# Altium PCB SS_MB_CONV1.1.PcbDoc (part 1 of 3)
Units mil, origin at the board's own origin, x right, y up, seen from the top; angles counter-clockwise.
Board outline 10350 x 8520 mil, 2 copper layers (Top Layer, Bottom Layer); 190 components, 282 nets, 1015 pads, 457 vias.
Unrouted connection lines stored in the file: 1.
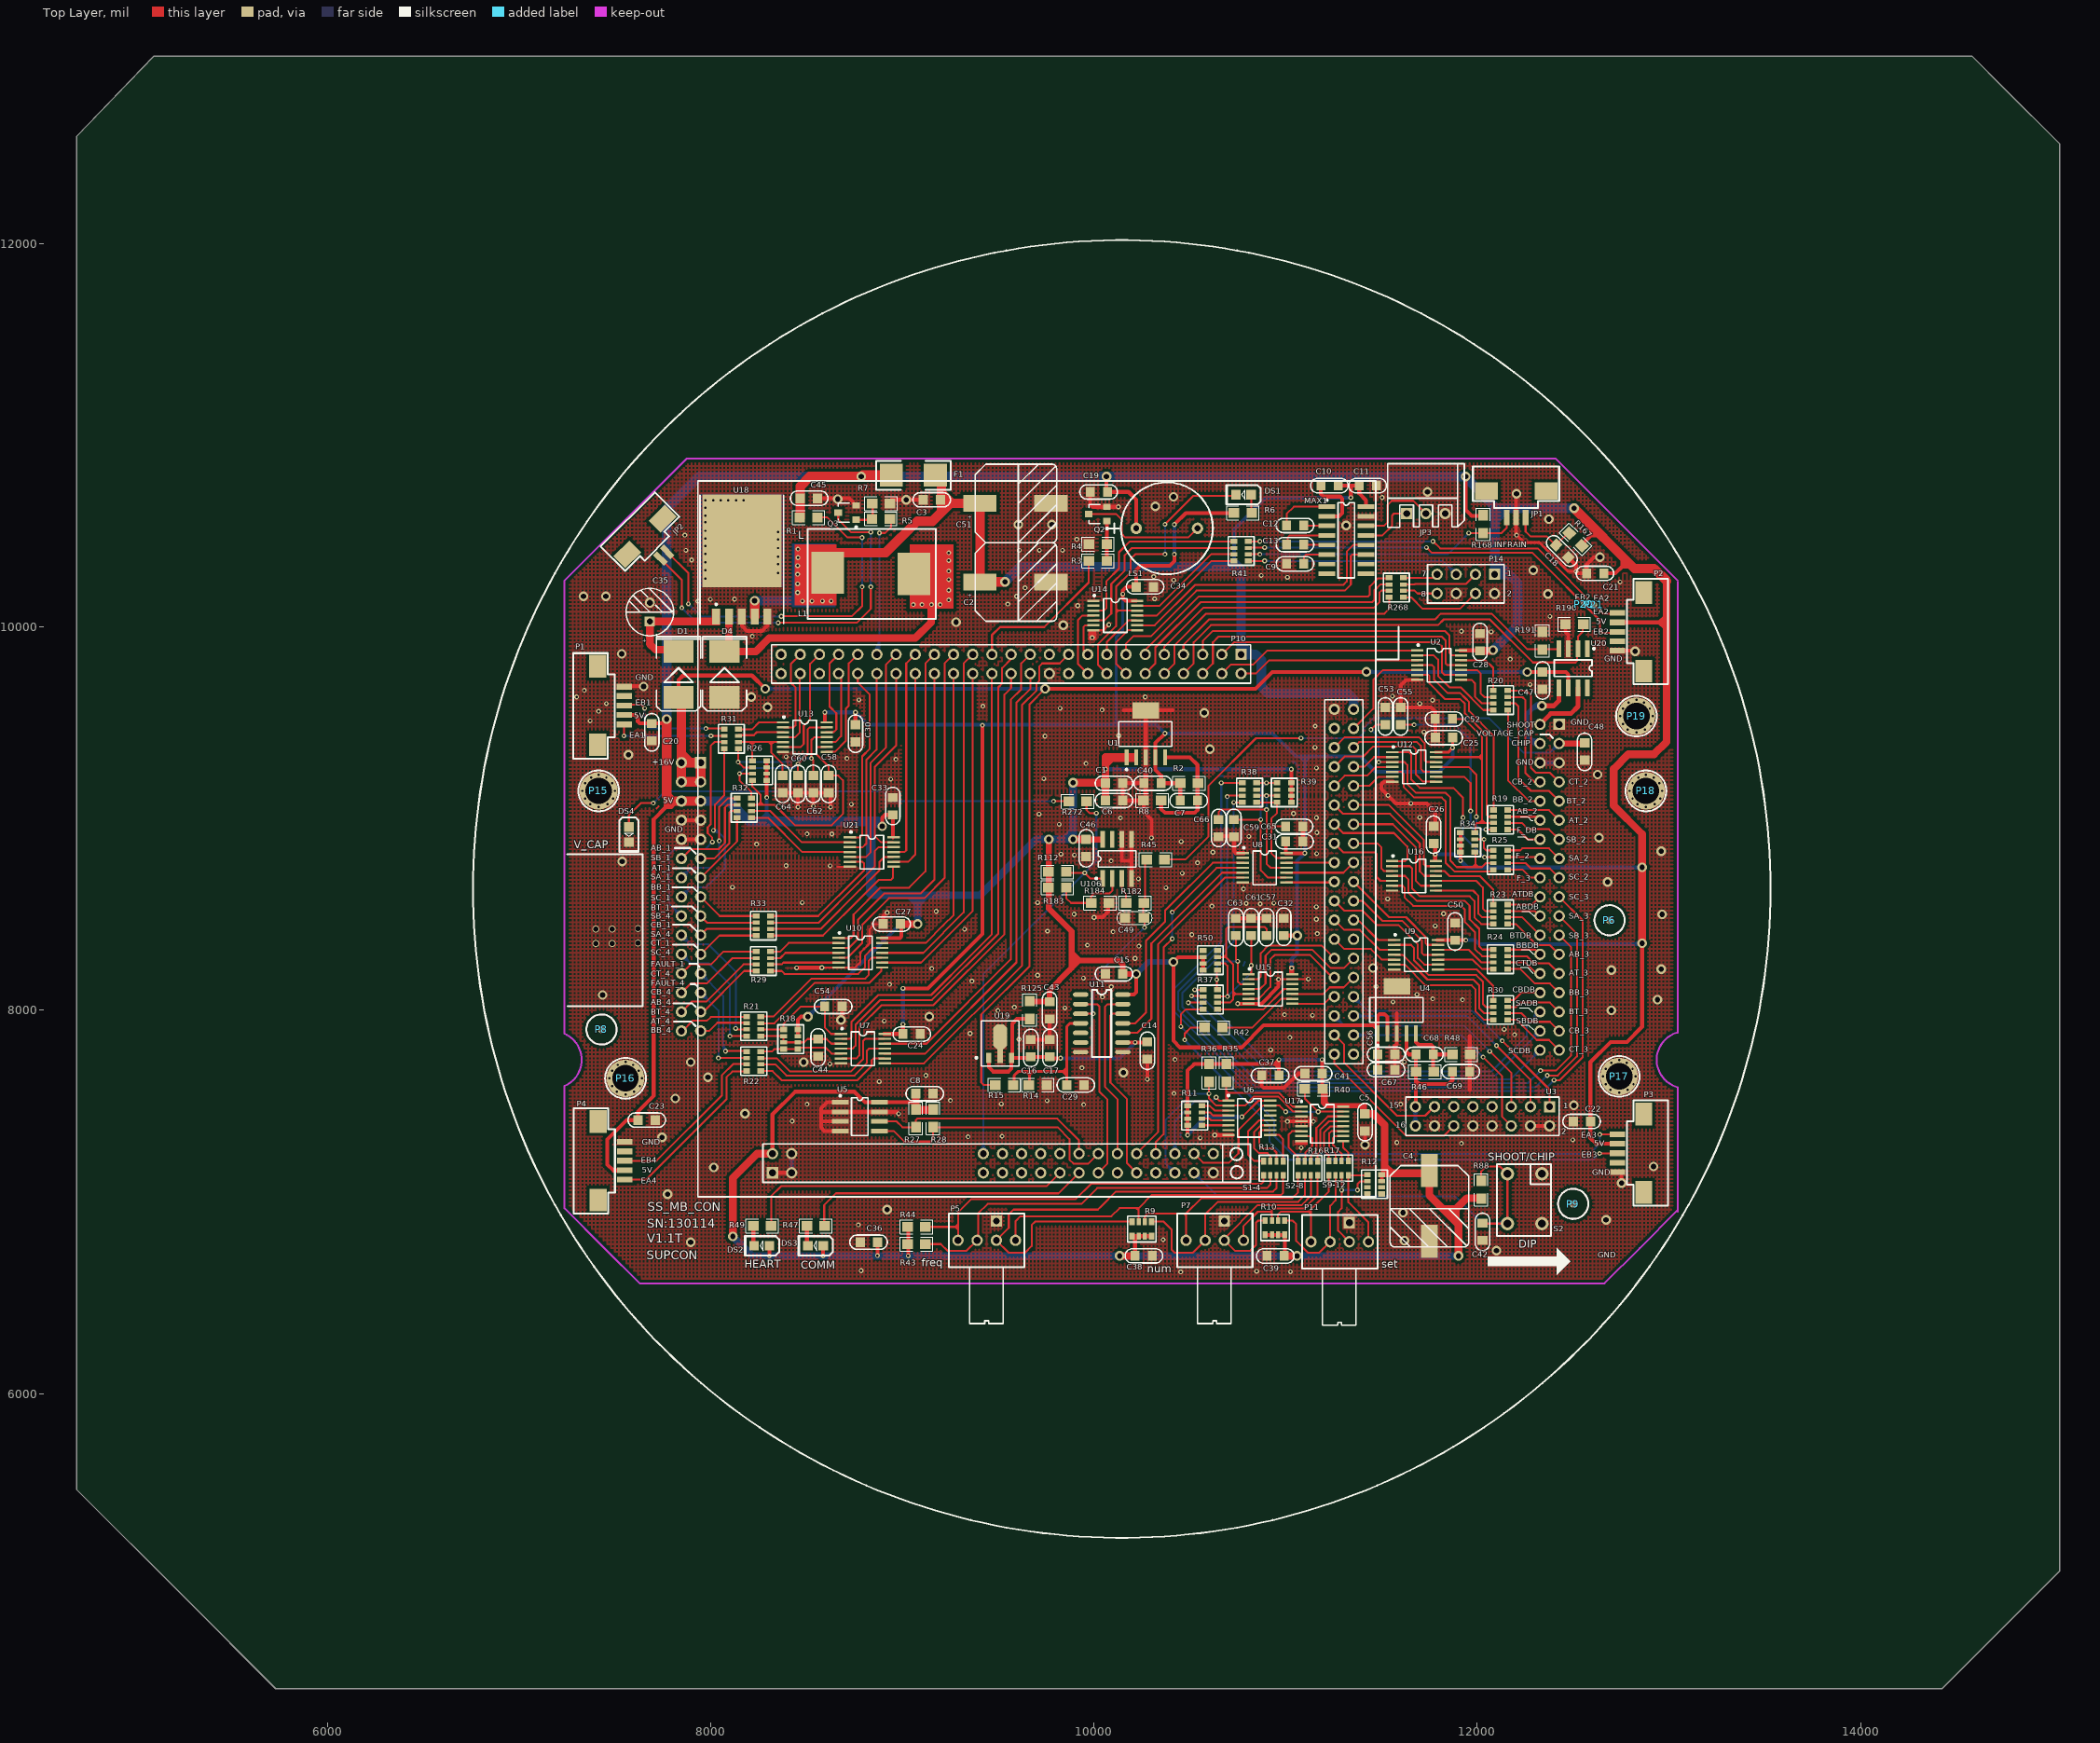
[diagram p0: Top Layer view]
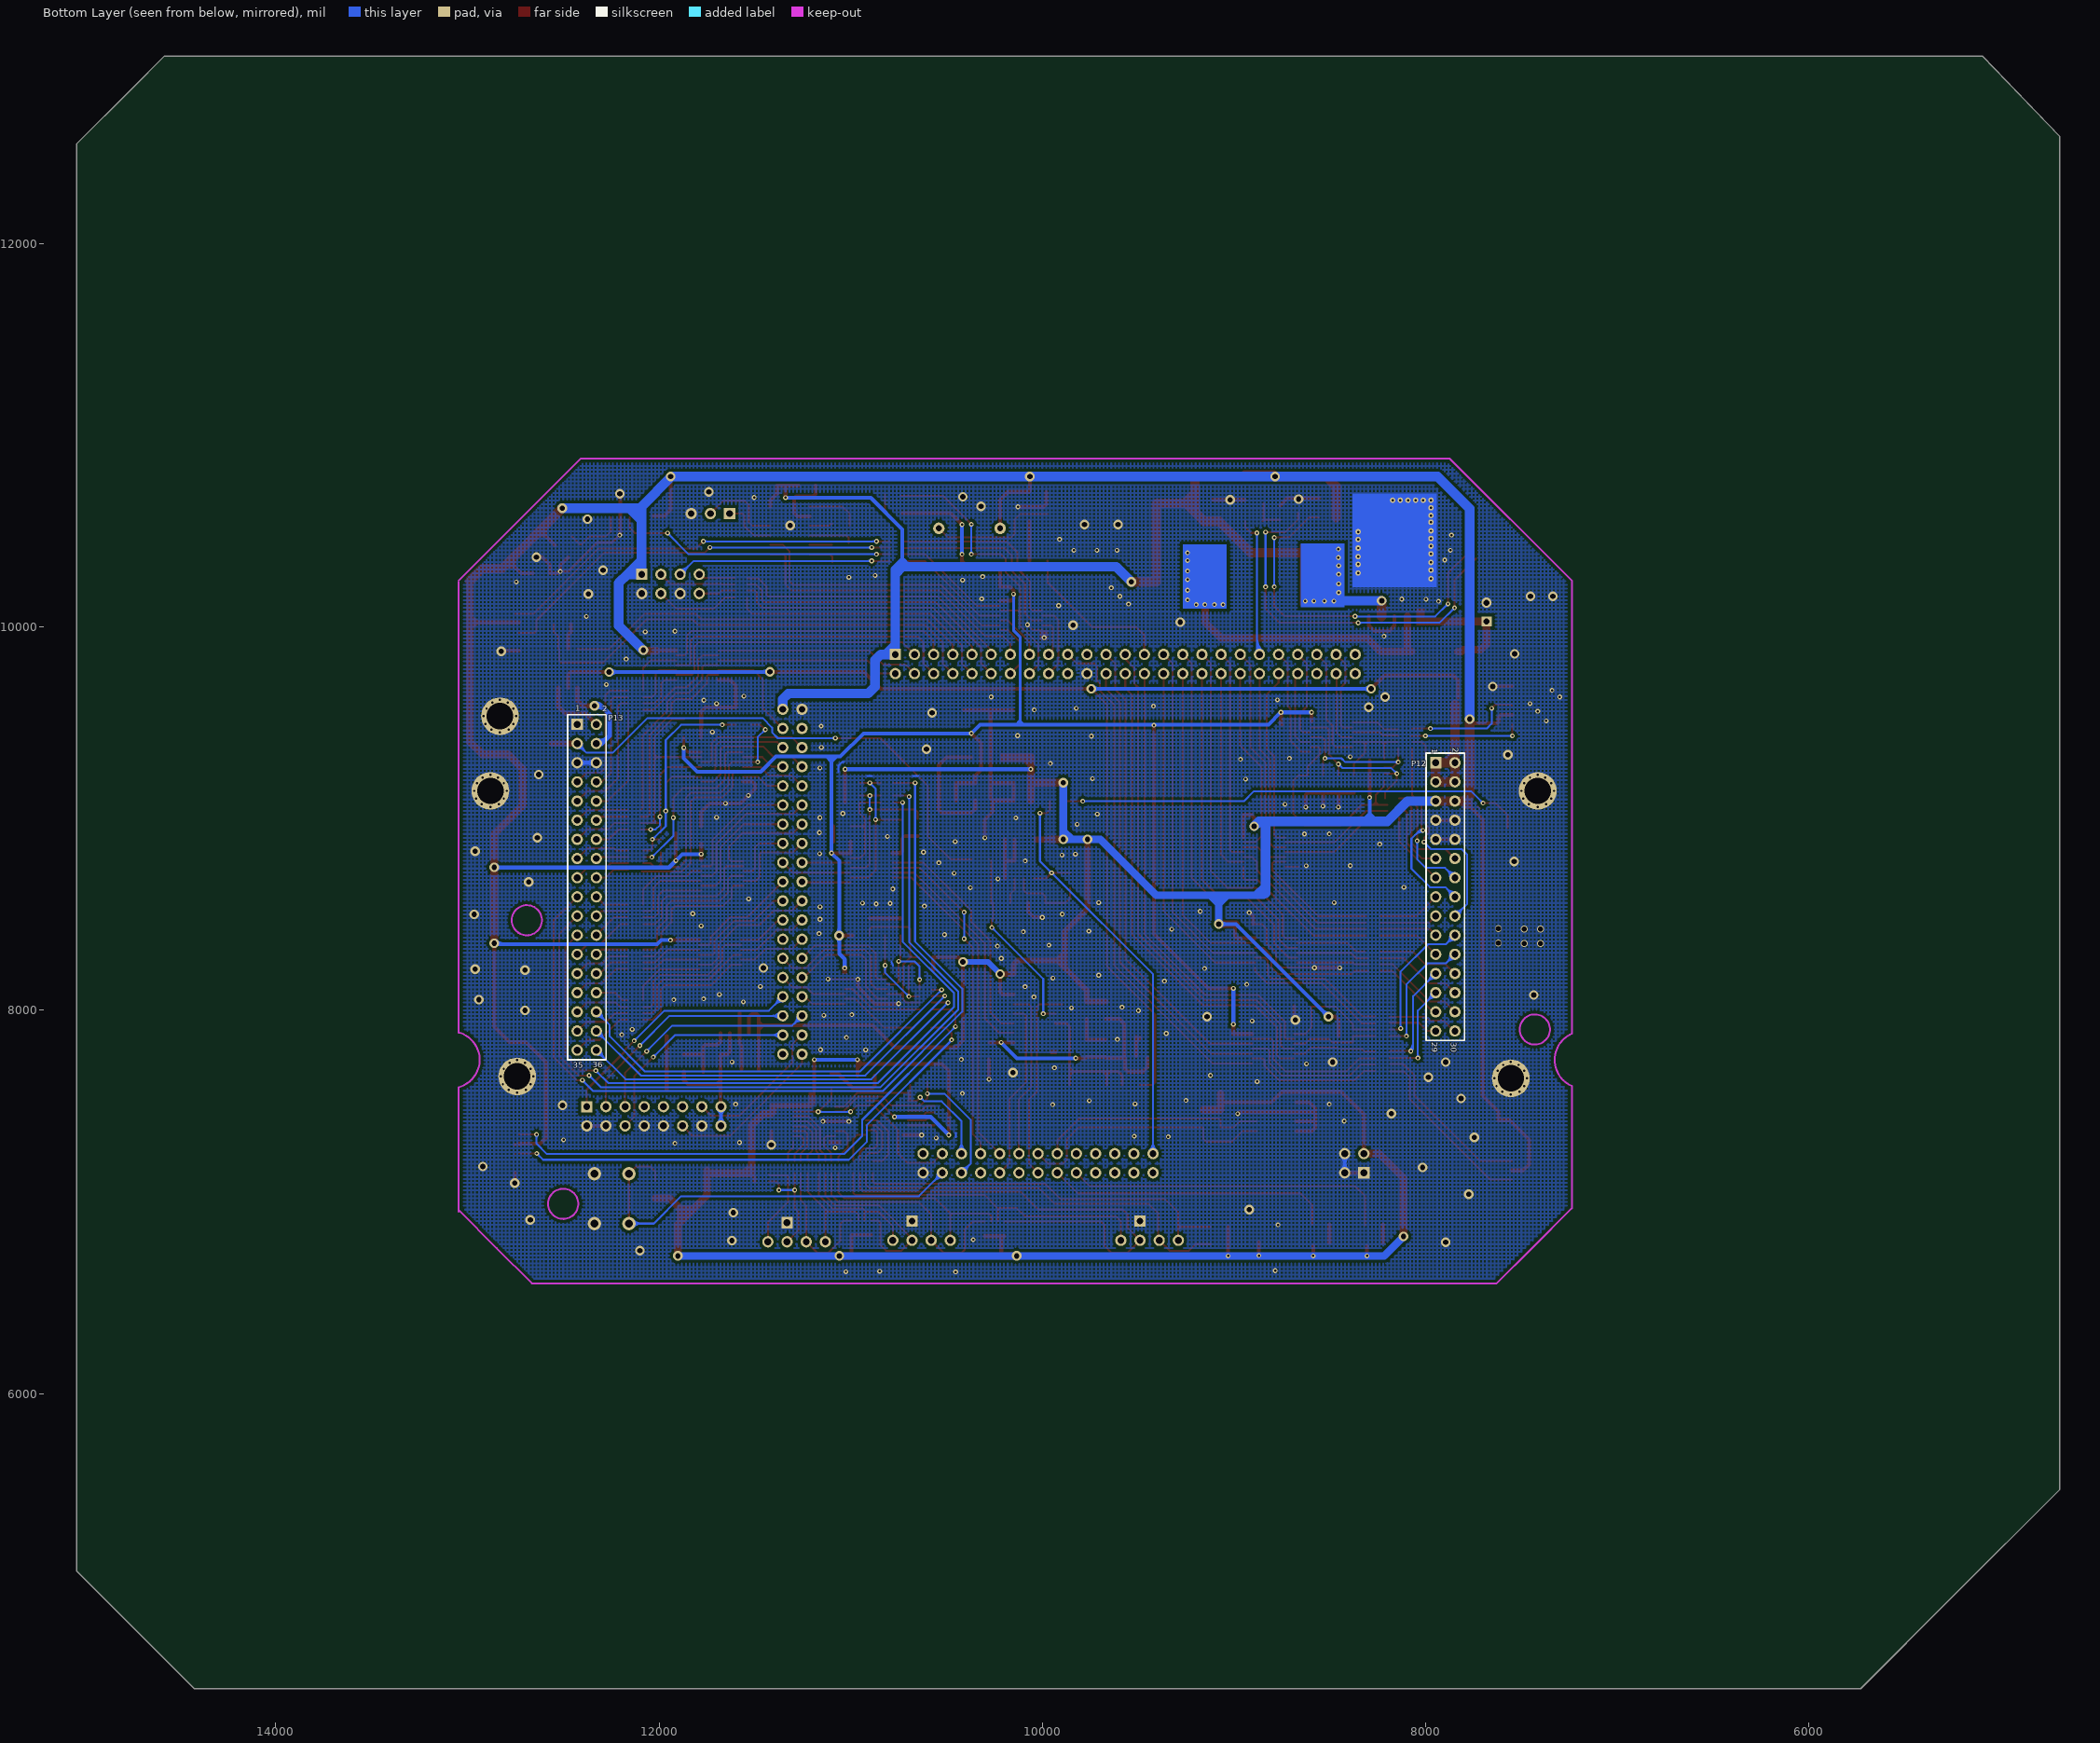
[diagram p1: Bottom Layer view, seen from below]

## Layer stack, top to bottom
Top Solder: solder mask 0.4, Solder Resist, Dk 3.5
Top Layer: signal copper 1.4
Dielectric1: dielectric 12.6, FR-4, Dk 4.8
Bottom Layer: signal copper 1.4
Bottom Solder: solder mask 0.4, Solder Resist, Dk 3.5

## Board outline
5095,12980 14580,12980 14750,12810 15040,12520 15040,5810 15040,5075 14540,4575 14425,4460 6690,4460 5730,4460 5250,4940 4690,5500 4690,12210 4690,12440 4690,12560

## Design rules (kind name [scope] priority, off if disabled: settings)
Clearance Clearance_1 [InPolygon] p1: gap=15 ignorepadtopadclearanceinfootprint=FALSE except(0: Arc-Hole Track-Hole SMDPad-Hole THPad-Hole Via-Hole Fill-Hole Poly-Hole Region-Hole Text-Hole)
Clearance [All] p2: gap=7 ignorepadtopadclearanceinfootprint=FALSE except(0: Arc-Hole Track-Hole SMDPad-Hole THPad-Hole Via-Hole Fill-Hole Poly-Hole Region-Hole Text-Hole)
ComponentClearance [OnLayer('Keep-Out Layer') vs OnLayer('Keep-Out Layer')] p1: gap=0 collisioncheckmode=3 verticalgap=0 showdistances=FALSE
FabricationTestPointUsage TestPointUsage [All] p1: valid=0 allowmultiple=FALSE
FabricationTestpoint Testpoint [All] p1: side=3 testpointundercomponent=TRUE minsize=25 maxsize=100 preferedsize=60 minholesize=0 maxholesize=40 preferedholesize=32 testpointgrid=1 allowsidetop=TRUE allowsidebottom=TRUE usegrid=TRUE gridtolerance=0.01
HoleSize [All] p1: absolutevalues=TRUE maxlimit=200 minlimit=1 maxpercent=80.000 minpercent=20.000
HoleToHoleClearance [All] p1: gap=0 allowstackedmicrovias=TRUE
MinimumSolderMaskSliver [All] p1: minsoldermaskwidth=1
PolygonConnect [All] p1: connectstyle=Direct reliefconductorwidth=10 reliefentries=4 polygonreliefangle="45 Angle" airgapwidth=10
RoutingVias [All] p1: holewidth=28 width=50 viastyle="Through Hole" minholewidth=12 minwidth=25 maxholewidth=28 maxwidth=50
SilkToSilkClearance [All] p1: silktosilkclearance=0
SilkToSolderMaskClearance SilkscreenOverComponentPads [IsPad] p1: minsilkscreentomaskgap=0 clearancetoexposedcopper=TRUE
SolderMaskExpansion [All] p1: expansion=4
Width [All] p1: maxlimit=600 minlimit=8 preferedwidth=12
22 further rules are at their usual default settings.

## Components (designator, comment, footprint, x,y, rotation, side; value= is the part's Value field where it differs from the comment)
C1 "1uF" 0805C#1 10060,9185 r0 top
C2 "470uF" J10 9405,10235 r0 top
C3 "0.1uF" 0805C#1 9109,10664 r0 top
C4 "470uF" J10 11750,7165 r270 top
C5 "0.1uF" 0805C#1 11414,7460 r270 top
C6 "0.1uF" 0805C#1 10060,9095 r0 top
C7 "15pF" 0805C#1 10450,9095 r0 top
C8 "0.1uF" 0805C#1 9160,7565 r180 top
C9 "1uF" 0805C#1 11005,10330 r0 top
C10 "1uF" 0805C#1 11184,10738 r0 top
C11 "1uF" 0805C#1 11384,10738 r0 top
C12 "1uF" 0805C#1 11005,10530 r0 top
C13 "1uF" 0805C#1 11005,10430 r0 top
C14 "0.1uF" 0805C#1 10278,7745 r90 top
C15 "0.1uF" 0805C#1 10060,8190 r0 top
C16 "1uF" 0805C#1 9670,7847 r270 top
C17 "0.1uF" 0805C#1 9770,7847 r270 top
C18 "4.7uF" 0805C#1 12410.42,10427.69 r315 top
C19 "0.1uF" 0805C#1 9980,10705 r0 top
C20 "0.1uF" 0805C#1 7692,9407 r90 top
C21 "0.1uF" 0805C#1 12570,10280 r0 top
C22 "0.1uF" 0805C#1 12501,7420 r0 top
C23 "0.1uF" 0805C#1 7710,7427 r180 top
C24 "0.1uF" 0805C#1 9093,7876 r180 top
C25 "0.1uF" 0805C#1 11781,9423 r0 top
C26 "0.1uF" 0805C#1 11772,8960 r270 top
C27 "0.1uF" 0805C#1 8900,8450 r0 top
C28 "0.1uF" 0805C#1 12014,9966 r270 top
C29 "0.1uF" 0805C#1 9948,7610 r180 top
C30 "0.1uF" 0805C#1 8755,9400 r90 top
C31 "0.1uF" 0805C#1 11090,8880 r180 top
C32 "0.1uF" 0805C#1 10990,8480 r270 top
C33 "0.1uF" 0805C#1 8950,9110 r270 top
C34 "0.1uF" 0805C#1 10310,10210 r180 top
C35 "100uF" CAPPR2.5-6.3 7682,10029 r90 top
C36 "0.1uF" 0805C#1 8780,6790 r0 top
C37 "0.1uF" 0805C#1 10875,7660 r0 top
C38 "0.1uF" 0805C#1 10304,6718.47 r180 top
C39 "0.1uF" 0805C#1 10902,6718 r0 top
C40 "2.2uF" 0805C#1 10350,9185 r180 top
C41 "0.1uF" 0805C#1 11100,7670 r0 top
C42 "0.1uF" 0805C#1 12027,6800 r90 top
C43 "0.1uF" 0805C#1 9768,7955 r90 top
C44 "0.1uF" 0805C#1 8560,7850 r270 top
C45 "0.1uF" 0805C#1 8557,10672 r180 top
C46 "0.1uF" 0805C#1 9959,8802 r90 top
C47 "0.1uF" 0805C#1 12340,9765 r270 top
C48 "0.1uF" 0805C#1 12560,9305 r90 top
C49 "0.1uF" 0805C#2 10166,8482 r0 top
C50 "0.1uF" 0805C#1 11884,8455 r270 top
C51 "470uF" J10 9405,10645 r0 top
C52 "0.1uF" 0805C#1 11870,9520 r180 top
C53 "0.1uF" 0805C#1 11520,9490 r90 top
C54 "0.1uF" 0805C#1 8595,8020 r0 top
C55 "0.1uF" 0805C#1 11600,9490 r90 top
C56 "1uF" 0805C#1 11480,7770 r0 top
C57 "0.1uF" 0805C#1 10900,8390 r90 top
C58 "0.1uF" 0805C#1 8615,9225 r270 top
C59 "0.1uF" 0805C#1 10730,8995 r270 top
C60 "0.1uF" 0805C#1 8455,9225 r270 top
C61 "0.1uF" 0805C#1 10820,8390 r90 top
C62 "0.1uF" 0805C#1 8535,9225 r270 top
C63 "0.1uF" 0805C#1 10740,8390 r90 top
C64 "0.1uF" 0805C#1 8375,9225 r270 top
C65 "0.1uF" 0805C#1 11000,8960 r0 top
C66 "0.1uF" 0805C#1 10650,8995 r270 top
C67 "0.1uF" 0805C#1 11480,7690 r0 top
C68 "15pF" 0805C#1 11680,7770 r0 top
C69 "2.2uF" 0805C#1 11870,7680 r0 top
D1 "SS36" SMC 7832,9632 r90 top
D4 "SS36" SMC 8072,9632 r90 top
DS1 "LED2" 0805D 10820,10690 r180 top
DS2 "LED1" 0805D 8306.39,6771.39 r180 top
DS3 "LED2" 0805D 8586.39,6771.39 r180 top
DS4 "LED2" 0805D 7573,8957 r270 top
F1 "3A" 2512r 9172,10792 r180 top
JP1 "Header 3" SMD-3P-1.25 12252,10572 r180 top
JP2 "Header 2" SMD-2P-1.25 7772,10392 r225 top
JP3 "Header 3" 5264-R-3P-2.54 11632,10592 r0 top
L1 "Inductor" L 8870,10205 r180 top
LS1 "Buzzer" Buzzer 10220,10515 r0 top locked
MAX1 "MAX232CSE(16)" NSO16 11214,10628 r90 top
P1 "Header 5" SMD-5P-1.25 7547.8,9688.7 r270 top
P2 "Header 5" SMD-5P-1.25 12730,9876.57 r90 top
P3 "Header 5" SMD-5P-1.25 12730,7155.79 r90 top locked
P4 "Header 5" SMD-5P-1.25 7550,7313.43 r270 top
P5 "COAX-M" A6RV-161RS 9490,6900 r0 top
P6 "Plug" MARK 12690,8470 r0 top
P7 "COAX-M" A6RV-161RS 10680,6900 r0 top
P8 "Plug" MARK 7430,7900 r0 top
P9 "Plug" MARK 12500,6990 r0 top
P10 "CONNECTOR_FPGA" CONNECTOR_FPGA 10767,9857 r0 top locked
P11 "COAX-M" A6RV-161RS 11332,6892 r0 top
P12 "Header 15X2" HDR2X15 7947,9292 r270 bottom locked
P13 "Header 18X2" HDR2X18 12427,9492 r270 bottom locked
P14 "Header 4X2" HDR2X4 12090,10275 r180 top
P15 "安装孔" "安装孔 3.5-5" 7415,9145 r0 top locked
P16 "安装孔" "安装孔 3.5-5" 7555,7645 r0 top locked
P17 "安装孔" "安装孔 3.5-5" 12740,7655 r0 top locked
P18 "安装孔" "安装孔 3.5-5" 12880,9145 r0 top
P19 "安装孔" "安装孔 3.5-5" 12830,9535 r0 top
P20 "安装孔" TestPoint 12555.26,10119.74 r90 top
P21 "安装孔" TestPoint 12609.39,10115.61 r90 top
Q2 "9013" SO-G3/Y1 10040,10605 r90 top
Q3 "9013" SO-G3/Y1 8732,10612 r90 top
R1 "300" 0805R 8557,10572 r180 top
R2 "51k ％1" 0805R 10450,9185 r0 top
R3 "2.2K" 0805R 9974,10345 r0 top
R4 "1K" 0805R 10067,10433 r180 top
R5 "2.2K" 0805R 8934,10565 r180 top
R6 "510" 0805R 10730,10595 r0 top
R7 "1K" 0805R 8842,10645 r0 top
R8 "30k  ％1" 0805R 10350,9095 r180 top
R9 "10K" 0603排阻 10300,6895.99 r270 top
R10 "10K" 0603排阻 10995,6902.99 r270 top
R11 "2K" 0603排阻 10563,7400 r180 top
R12 "10K" 0603排阻 11426.01,7143 r0 top
R13 "22" 0603排阻 10987,7212.99 r270 top
R14 "3.3k" 0805R 9753,7610 r180 top
R15 "22k" 0805R 9578,7610 r180 top
R16 "22" 0603排阻 11064.5,7138.36 r90 top
R17 "22" 0603排阻 11225,7139 r90 top
R18 "10K" 0603排阻 8380,7900 r0 top
R19 "22" 0603排阻 12084.01,9045 r0 top
R20 "22" 0603排阻 12083.01,9669 r0 top
R21 "22" 0603排阻 8187.01,7967 r0 top
R22 "22" 0603排阻 8187.01,7785 r0 top
R23 "22" 0603排阻 12083,8552 r0 top
R24 "22" 0603排阻 12083,8317 r0 top
R25 "22" 0603排阻 12083.01,8835 r0 top
R26 "10K" 0603排阻 8217.01,9302 r0 top
R27 "10k" 0805R 9070,7390 r90 top
R28 "10k" 0805R 9160,7390 r90 top
R29 "22" 0603排阻 8237.01,8307 r0 top
R30 "22" 0603排阻 12083,8052 r0 top
R31 "22" 0603排阻 8070,9467 r0 top
R32 "22" 0603排阻 8137.01,9107 r0 top
R33 "22" 0603排阻 8237.01,8492 r0 top
R34 "10k" 0603排阻 11912.01,8927 r0 top
R35 "1.6K" 0805R 10690,7720 r270 top
R36 "1.6K" 0805R 10600,7720 r270 top
R37 "22" 0603排阻 10569.01,8107 r0 top
R38 "22" 0603排阻 10774,9187 r0 top
R39 "10K" 0603排阻 10955.01,9187 r0 top
R40 "1K" 0805R 11100,7590 r0 top
R41 "22" 0603排阻 10730,10447 r0 top
R42 "22" 0805R 10670,7910 r180 top
R43 "10k" 0805R 9120,6780 r180 top
R44 "10k" 0805R 9120,6870 r180 top
R45 "10k" 0805R 10368,8787 r180 top
R46 "51k ％1" 0805R 11680,7680 r0 top
R47 "510" 0805R 8595,6875 r180 top
R48 "30k  ％1" 0805R 11870,7770 r0 top
R49 "510" 0805R 8315,6875 r180 top
R50 "10K" 0603排阻 10569.01,8312 r0 top
R88 "10K" 0805R 12020,7110 r270 top
R112 "1K" 0805R 9855,8722 r180 top
R125 "470" 0805R 9665,7955 r90 top
R167 "100" 0805R 12480,10490 r315 top
R168 "20K" 0805R 12030,10490 r90 top
R182 "10K" 0805R 10167,8560 r0 top
R183 "10K" 0805R 9855,8640 r180 top
R184 "2K" 0805R 9985,8560 r0 top
R190 "10k" 0805R 12460,10015 r0 top
R191 "10k" 0805R 12340,9975 r270 top
R268 "22" 0603排阻 11540,10257 r0 top
R272 "1K" 0805R 9868,9091 r0 top
S2 "SW-PB" SWPUSH 12252,7032 r270 top
U1 "TPS79401/501" SOT223-6 10170,9320 r0 top
U2 "*" SOP14 11691.5,9877.95 r0 top
U3 "nRF2401" HDR2X8 12377,7497 r180 top
U4 "TPS79401/501" SOT223-6 11480,7880 r0 top
U5 "AT24C8" SO-G8 8777.64,7445 r270 top
U6 "PCA9557PW" TSSOP16 10701.5,7527.95 r0 top
U7 "*" SOP14 8685,7876.77 r0 top
U8 "*" SOP14 10781.5,8820.59 r0 top
U9 "*" SOP14 11571.5,8366.77 r0 top
U10 "*" SOP14 8671.5,8376.77 r0 top
U11 "TLC0834" SO-14 9930,8082 r0 top
U12 "*" SOP14 11561.5,9346.77 r0 top
U13 "*" SOP14 8381.5,9502.36 r0 top
U14 "*" SOP14 10001.5,10136.77 r0 top
U15 "*" SOP14 10811.5,8187.95 r0 top
U16 "*" SOP14 11560,8777.95 r0 top
U17 "PCA9557PW" TSSOP16 11081.5,7497.36 r0 top
U18 "LM2576T-5.0" D2PAK 8162,10222 r0 top
U19 "TL431CLP" SOT89 9510,7807 r0 top
U20 "MC34152D" SO-G8 12500,9785 r180 top
U21 "*" SOP14 8731.5,8902.36 r0 top
U106 "LM393" SO-g8 10120,8790 r0 top

## Footprints (in the part's own frame and the unit in brackets; to place one, negate y for a bottom-side part, rotate by r counter-clockwise, add the part's x,y. Pads: shape width x height; smd on the part's side, far side on the other; paste and mask are expansions set on the pad)
0603排阻 [mm]
  rect 0.9x0.7 smd: 1(0,0) 2(1.9,0) 7(0,-2.591) 8(1.9,-2.591)
  rect 0.9x0.55 smd: 3(0,-0.889) 4(1.9,-0.889) 5(0,-1.702) 6(1.9,-1.702)
  silkscreen extent -0.76,-3.17 2.67,0.61
0805C#1 [mm]
  rect 1.2x1.3 smd: 1(0,0) 2(2.286,0)
  silkscreen extent -1.37,-0.95 3.59,0.95
0805C#2 [mm]
  rect 1.4x1.3 smd: 1(-0.102,0) 2(2.388,0)
  silkscreen extent -1.22,-0.88 3.49,0.87
0805D [mil] "二极管"
  rect 50x50 smd: 1(0,0) 2(80,0)
  silkscreen extent -50,-50 130,50
0805R [mm]
  rect 1.4x1.3 smd: 1(0,0) 2(2.362,0)
  silkscreen extent -0.97,-0.91 3.33,0.91
2512r [mil] "Chip Resistor; Body 6.3 x 3.2 mm (LxW typ)"
  rect 120x120 smd: 1(0,0) 2(230,0)
  silkscreen extent -80,-75 310,75
5264-R-3P-2.54 [mm]
  rect 1.5x1.5 hole 0.9: 1(0,0)
  round 1.5 hole 0.9: 2(2.54,0) 3(5.08,0)
  silkscreen extent -2.54,-1.8 7.62,6.6
A6RV-161RS [mm] "旋转开关 直插 侧面操作 4*1"
  rect 1.5x1.5 hole 0.9: 1(0,0)
  round 1.5 hole 0.9: 2(-5.08,-2.54) 3(-2.54,-2.54) 4(0,-2.54) 5(2.54,-2.54)
  silkscreen extent -6.27,-13.59 3.73,1.02
Buzzer [mil]
  round 60 hole 30: 1(0,0) 2(320,0)
  silkscreen extent -80,-240 400,240
CAPPR2.5-6.3 [mm] "Capacitor, Electrolytic, Radial; Body 6.3 x 11 mm (Dia.xH typ); Pin Spacing 2.5 mm (typ)"
  rect 1.35x1.35 hole 0.8: 1(0,0)
  round 1.35 hole 0.8: 2(2.5,0)
  silkscreen extent -1.9,-3.15 4.4,3.15
CONNECTOR_FPGA [mm]
  rect 1.5x1.5 hole 0.9: 1(0,0) 51(-62.103,-68.707)
  round 1.5 hole 0.9: 2(0,-2.54) 3(-2.54,0) 4(-2.54,-2.54) 5(-5.08,0) 6(-5.08,-2.54) 7(-7.62,0) 8(-7.62,-2.54) 9(-10.16,0) 10(-10.16,-2.54) 11(-12.7,0) 12(-12.7,-2.54) 13(-15.24,0) 14(-15.24,-2.54) 15(-17.78,0) 16(-17.78,-2.54) 17(-20.32,0) 18(-20.32,-2.54) 19(-22.86,0) 20(-22.86,-2.54) 21(-25.4,0) 22(-25.4,-2.54) 23(-27.94,0) 24(-27.94,-2.54) 25(-30.48,0) 26(-30.48,-2.54) 27(-33.02,0) 28(-33.02,-2.54) 29(-35.56,0) 30(-35.56,-2.54) 31(-38.1,0) 32(-38.1,-2.54) 33(-40.64,0) 34(-40.64,-2.54) 35(-43.18,0) 36(-43.18,-2.54) 37(-45.72,0) 38(-45.72,-2.54) 39(-48.26,0) 40(-48.26,-2.54) 41(-50.8,0) 42(-50.8,-2.54) 43(-53.34,0) 44(-53.34,-2.54) 45(-55.88,0) 46(-55.88,-2.54) 47(-58.42,0) 48(-58.42,-2.54) 49(-60.96,0) 50(-60.96,-2.54) 52(-62.103,-66.167) 53(-59.563,-68.707) 54(-59.563,-66.167) 73(-34.163,-68.707) 74(-34.163,-66.167) 75(-31.623,-68.707) 76(-31.623,-66.167) 77(-29.083,-68.707) 78(-29.083,-66.167) 79(-26.543,-68.707) 80(-26.543,-66.167) 81(-24.003,-68.707) 82(-24.003,-66.167) 83(-21.463,-68.707) 84(-21.463,-66.167) 85(-18.923,-68.707) 86(-18.923,-66.167) 87(-16.383,-68.707) 88(-16.383,-66.167) 89(-13.843,-68.707) 90(-13.843,-66.167) 91(-11.303,-68.707) 92(-11.303,-66.167) 93(-8.763,-68.707) 94(-8.763,-66.167) 95(-6.223,-68.707) 96(-6.223,-66.167) 97(-3.683,-68.707) 98(-3.683,-66.167) 113(14.91,-52.984) 114(12.37,-52.984) 115(14.91,-50.444) 116(12.37,-50.444) 117(14.91,-47.904) 118(12.37,-47.904) 119(14.91,-45.364) 120(12.37,-45.364) 121(14.91,-42.824) 122(12.37,-42.824) 123(14.91,-40.284) 124(12.37,-40.284) 125(14.91,-37.744) 126(12.37,-37.744) 127(14.91,-35.204) 128(12.37,-35.204) 129(14.91,-32.664) 130(12.37,-32.664) 131(14.91,-30.124) 132(12.37,-30.124) 133(14.91,-27.584) 134(12.37,-27.584) 135(14.91,-25.044) 136(12.37,-25.044) 137(14.91,-22.504) 138(12.37,-22.504) 139(14.91,-19.964) 140(12.37,-19.964) 141(14.91,-17.424) 142(12.37,-17.424) 143(14.91,-14.884) 144(12.37,-14.884) 145(14.91,-12.344) 146(12.37,-12.344) 147(14.91,-9.804) 148(12.37,-9.804) 149(14.91,-7.264) 150(12.37,-7.264)
  silkscreen extent -72.01,-71.88 17.91,22.99
D2PAK [mm]
  rect 1.05x2.1 smd: 1(-3.4,-4.225) 2(-1.7,-4.225) 3(0,-4.225) 4(1.7,-4.225) 5(3.4,-4.225)
  rect 10.5x12.3 smd: 6(0,5.766)
  silkscreen extent -5.55,-5.17 5.56,11.83
HDR2X4 [mm] "Connector; Header; 4x2 Position"
  rect 1.5x1.5 hole 0.9: 1(0,0)
  round 1.5 hole 0.9: 2(0,2.54) 3(2.54,0) 4(2.54,2.54) 5(5.08,0) 6(5.08,2.54) 7(7.62,0) 8(7.62,2.54)
  silkscreen extent -1.27,-1.27 8.89,3.81
HDR2X8 [mm]
  rect 1.5x1.5 hole 0.9: 1(0,0)
  round 1.5 hole 0.9: 2(0,2.54) 3(2.54,0) 4(2.54,2.54) 5(5.08,0) 6(5.08,2.54) 7(7.62,0) 8(7.62,2.54) 9(10.16,0) 10(10.16,2.54) 11(12.7,0) 12(12.7,2.54) 13(15.24,0) 14(15.24,2.54) 15(17.78,0) 16(17.78,2.54)
  silkscreen extent -1.27,-1.27 19.05,3.81
HDR2X15 [mm]
  rect 1.5x1.5 hole 0.9: 1(0,0)
  round 1.5 hole 0.9: 2(0,2.54) 3(2.54,0) 4(2.54,2.54) 5(5.08,0) 6(5.08,2.54) 7(7.62,0) 8(7.62,2.54) 9(10.16,0) 10(10.16,2.54) 11(12.7,0) 12(12.7,2.54) 13(15.24,0) 14(15.24,2.54) 15(17.78,0) 16(17.78,2.54) 17(20.32,0) 18(20.32,2.54) 19(22.86,0) 20(22.86,2.54) 21(25.4,0) 22(25.4,2.54) 23(27.94,0) 24(27.94,2.54) 25(30.48,0) 26(30.48,2.54) 27(33.02,0) 28(33.02,2.54) 29(35.56,0) 30(35.56,2.54)
  silkscreen extent -1.27,-1.27 36.83,3.81
HDR2X18 [mm]
  rect 1.5x1.5 hole 0.9: 1(0,0)
  round 1.5 hole 0.9: 2(0,2.54) 3(2.54,0) 4(2.54,2.54) 5(5.08,0) 6(5.08,2.54) 7(7.62,0) 8(7.62,2.54) 9(10.16,0) 10(10.16,2.54) 11(12.7,0) 12(12.7,2.54) 13(15.24,0) 14(15.24,2.54) 15(17.78,0) 16(17.78,2.54) 17(20.32,0) 18(20.32,2.54) 19(22.86,0) 20(22.86,2.54) 21(25.4,0) 22(25.4,2.54) 23(27.94,0) 24(27.94,2.54) 25(30.48,0) 26(30.48,2.54) 27(33.02,0) 28(33.02,2.54) 29(35.56,0) 30(35.56,2.54) 31(38.1,0) 32(38.1,2.54) 33(40.64,0) 34(40.64,2.54) 35(43.18,0) 36(43.18,2.54)
  silkscreen extent -1.27,-1.27 44.45,3.81
J10 [mm] "贴片点解电容"
  rect 4.4x2.2 smd: 1(0,0) 2(9.398,0)
  silkscreen extent -0.64,-5.21 10.16,5.21
L [mil]
  rect 170x220 smd: 1(-190,-72.5) 2(260,-77.5)
  silkscreen extent -305,-308 365,163
MARK [mm]
  round 1 smd: 1(0,0)
  Keep-Out Layer circle w0.254: c0,0 r2
  silkscreen extent -2,-2 2,2
NSO16 [mm]
  rect 0.6x2.2 smd: 1(0,0) 2(-1.27,0) 3(-2.54,0) 4(-3.81,0) 5(-5.08,0) 6(-6.35,0) 7(-7.62,0) 8(-8.89,0) 9(-8.89,-5.2) 10(-7.62,-5.2) 11(-6.35,-5.2) 12(-5.08,-5.2) 13(-3.81,-5.2) 14(-2.54,-5.2) 15(-1.27,-5.2) 16(0,-5.2)
  silkscreen extent -9.44,-3.7 0.97,0.12
SMC [mm]
  rect 3x4 smd: 1(0,0) 2(6.096,0)
  silkscreen extent -1.78,-2.92 8.13,2.92
SMD-2P-1.25 [mm]
  rect 0.762x2.032 smd: 1(0,0) 2(1.25,0)
  rect 3x2.25 smd: ""(-2.7,-3.5) ""(3.95,-3.5)
  silkscreen extent -4.45,-6.73 5.71,-1.27
SMD-3P-1.25 [mm]
  rect 0.762x2.032 smd: 1(0,0) 2(1.25,0) 3(2.5,0)
  rect 3x2.25 smd: ""(-2.7,-3.5) ""(5.2,-3.5)
  silkscreen extent -4.44,-6.73 6.99,-1.27
SMD-5P-1.25 [mm]
  rect 0.762x2.032 smd: 1(0,0) 2(1.25,0) 3(2.5,0) 4(3.75,0) 5(5,0)
  rect 3x2.25 smd: ""(-2.7,-3.5) ""(7.7,-3.5)
  silkscreen extent -4.44,-6.73 9.53,-1.27
SO-14 [mil]
  oval 80x24 smd: 1(0,0) 2(0,-50) 3(0,-100) 4(0,-150) 5(0,-200) 6(0,-250) 7(0,-300) 8(220,-300) 9(220,-250) 10(220,-200) 11(220,-150) 12(220,-100) 13(220,-50) 14(220,0)
  silkscreen extent 60,-325 160,25
SO-G3/Y1 [mm]
  rect 0.85x1 smd: 1(-1.331,-0.692) 2(0.569,-0.692) 3(-0.381,1.708)
  silkscreen extent -2.43,-0.82 0.89,1.71
SO-G8 [mm] "Small Outline; 8 Leads; Body Width 3.9 mm; Pitch 1.27 mm"
  rect 0.6x2.2 smd: 1(-1.905,-2.6) 2(-0.635,-2.6) 3(0.635,-2.6) 4(1.905,-2.6) 5(1.905,2.6) 6(0.635,2.6) 7(-0.635,2.6) 8(-1.905,2.6)
  silkscreen extent -2.88,-2.72 2.5,1.1
SO-g8 [mm]
  rect 0.6x2.2 smd: 1(-1.905,-2.6) 2(-0.635,-2.6) 3(0.635,-2.6) 4(1.905,-2.6) 5(1.905,2.6) 6(0.635,2.6) 7(-0.635,2.6) 8(-1.905,2.6)
  silkscreen extent -2.88,-2.72 2.5,1.1
SOP14 [mm]
  rect 1.65x0.3 smd: 1(-0.127,0) 2(-0.127,-0.65) 3(-0.127,-1.3) 4(-0.127,-1.95) 5(-0.127,-2.6) 6(-0.127,-3.25) 7(-0.127,-3.9) 8(5.677,-3.9) 9(5.677,-3.25) 10(5.677,-2.6) 11(5.677,-1.95) 12(5.677,-1.3) 13(5.677,-0.65) 14(5.677,0)
  silkscreen extent -0.12,-4.19 4.33,0.82
SOT89 [mm] "SOT-89; Body 4.6 x 4.25 mm, inc. leads (LxW max)"
  oct 1.9x3.3 smd: 0(0,1.388)
  rect 0.7x1.35 smd: 1(-1.5,-1.388) 3(1.5,-1.388)
  rect 0.7x1.8 smd: 2(0,-1.163)
  silkscreen extent -3.27,-2.51 2.5,3.49
SOT223-6 [mm]
  rect 0.51x2.15 smd: 1(0,0) 2(1.27,0) 3(2.54,0) 4(3.81,0) 5(5.08,0)
  rect 3.5x2.15 smd: 6(2.54,6.223)
  silkscreen extent -1.05,-1.75 5.99,4.72
SWPUSH [mil]
  round 70 hole 40: 1(-115,85) 1(145,85) 2(-115,-95) 2(145,-95)
  silkscreen extent -165,-150 210,132
TestPoint [mm]
  round 0.8 smd: 1(0,0)
TSSOP16 [mm]
  rect 1.65x0.3 smd: 1(0,0) 2(0,-0.65) 3(0,-1.3) 4(0,-1.95) 5(0,-2.6) 6(0,-3.25) 7(0,-3.9) 8(0,-4.55) 9(5.55,-4.55) 10(5.55,-3.9) 11(5.55,-3.25) 12(5.55,-2.6) 13(5.55,-1.95) 14(5.55,-1.3) 15(5.55,-0.65) 16(5.55,0)
  silkscreen extent -0.12,-4.82 4.33,0.82
"安装孔 3.5-5" [mm]
  round 5 hole 3.5: 1(0,0)
  silkscreen extent -2.7,-2.7 2.7,2.7

## Part data
C1 C5 C6 C7 C40 C56 C67 C68 C69: library part CAP, "Capacitor"
C2 C51: library part Cap2, "25V 470uf 10*10"
C3 C8 C14 C15 C16 C17 C18 C19 C20 C21 C22 C23 C24 C25 C26 C27 C28 C29 C30 C31 C32 C33 C34 C36 C37 C38 C39 C41 C42 C43 C44 C45 C46 C47 C48 C49 C50 C52 C53 C54 C55 C57 C58 C59 C60 C61 C62 C63 C64 C65 C66: library part Cap, "Capacitor"
C4 C35: library part Cap2, "Capacitor"
C9 C10 C11 C12 C13: library part CAP2, "Bi-Polar Capacitor"
D1 D4: library part Diode, "Default Diode"
DS1 DS2 DS3 DS4: "Typical RED, GREEN, YELLOW, AMBER GaAs LED"
F1 R1 R3 R4 R5 R6 R7 R14 R15 R35 R36 R37 R38 R39 R40 R47 R49 R88 R112 R125 R167 R168 R182 R183 R184 R268 R272: library part Res1, "Resistor"
JP1 JP3: "Header, 3-Pin"
JP2: "Header, 2-Pin"
MAX1: "+-15KV ESD-PROTECTED, +5V RS-232 TRANSCEIVERS"
P1 P2 P3 P4: "Header, 5-Pin"
P5 P7 P11: "RF Coaxial PCB Connector, MMCX; Thru-Hole, Vertical Mount Plug,  50 Ohm Impedance"
P12: "Header, 15-Pin, Dual row"
P13: "Header, 18-Pin, Dual row"
P14: "Header, 4-Pin, Dual row"
P15 P16 P17 P18 P19 P20 P21: library part Plug, "Plug"
Q2 Q3: library part BC817-40, "NPN General Purpose Amplifier"
R2 R8 R46 R48: library part RES
R9 R17 R19 R20 R21 R27 R28 R29 R31 R32 R34 R41 R42 R43 R44 R45 R190 R191: library part SR0805, "Resistance"
R10 R11 R12 R13 R16 R18 R22 R23 R24 R25 R26 R30 R33 R50: library part 0805排阻
S2: "Switch"
U1 U4: library part TPS79401
U2 U7 U8 U9 U10 U12 U13 U14 U15 U16 U20 U21: library part SN74HC14D, "Hex Schmitt-Trigger Inverter"
U3: "2.4G, wireless"
U11: "8bit 4 channel , A to D"
U18: library part LM2575T-5.0, "Simple Switcher 1A Step Down Voltage Regulator"
U19: "Programmable Precision Reference"

## Free pads (board coordinates)
  round 28 hole 12: 8(7972,10252) 8(7972,10297) 8(7972,10337) 8(7972,10382) 8(7972,10422) 8(7972,10462) 8(7972,10502) 8(7972,10547) 8(7972,10582) 8(7972,10622) 8(7972,10662) 8(8012,10662) 8(8052,10662) 8(8092,10662) 8(8132,10662) 8(8172,10662) 8(8352,10282) 8(8352,10327) 8(8352,10367) 8(8352,10412) 8(8352,10457) 8(8352,10497)

## Via types
v1: diameter 25, hole 12, Top Layer to Bottom Layer, 365 vias
v2: diameter 50, hole 28, Top Layer to Bottom Layer, 86 vias
v3: diameter 35, hole 28, Top Layer to Bottom Layer, 6 vias

## Nets (pads, with @x,y where several pads share a name; then routed paths per layer and width w, separated by ;. In a path a pad name is that pad's centre, name@x,y a point inside that pad or via, vN(x,y) a via of type N, cw(c..) or ccw(c..) an arc to the next point about the centre after c; other vN are vias at no path point)
3.3V: C7.1 C24.2 C25.2 C30.2 C31.2 C32.2 C34.2 C40.1 R2.1 R6.1 U1.4 U7.14 U8.14 U12.14 U13.14 U14.14 U15.14 | length 9562.3
  Top Layer w16: U12.14@11780,9346.77 11847.77,9346.77 v1(11871,9370) C25.2@11871,9423
  Top Layer w20: U13.14@8595,9507.36 v1(8595,9555) ; C30.2@8750,9490 8755,9495 v1(8755,9555) ; U7.14@8903.5,7876.77 C24.2@9003,7876.77 ; C24.2@9003,7876 v1(9003,7927) ; v1(9003,8114) 9133,8114 9417.5,8398.5 v1(9417.5,9487.5) ; U14.14@10220,10136.77 10163.23,10136.77 10150,10150 10150,10190 10170,10210 C34.2@10220,10210 10220,10297 10243,10320 10395,10320 10419,10344 v1(10419,10380) ; v1(10370,9445) 10320,9395 U1.4@10320,9320 10320,9255 10350,9225 C40.1@10350,9185 R2.1@10450,9185 C7.1@10450,9095 ; v1(10419,10535) 10479,10595 10680,10595 R6.1@10730,10595 ; C32.2@10990,8390 v2(11060,8390) ; C31.2@11000,8880 11000,8820.59 11000.59,8820 v1(11100,8820)
  Bottom Layer w16: 10097,9490 10116,9509 10116,9511 ; 10115,9490 10116,9491 10116,9511 ; 10140,9490 10137,9490 10116,9511 ; v1(10150,10172) 10150,9982 10116,9948 10116,9511
  Bottom Layer w20: v1(8595,9555) v1(8755,9555) 8820,9490 10325,9490 v1(10370,9445) 10933,9445 11053.53,9324.47 ; v1(9003,7927) v1(9003,8114) ; v1(10419,10380) v1(10419,10535) ; v1(11031,8220) 11031,8266 11060,8295 v2(11060,8390) 11060,8780 v1(11100,8820) 11100,9299 ; v2@11049.39,8379.39 cw(c11023.79,8353.79) 11060,8353.79 cw(c11096.21,8353.79) v2@11070.61,8379.39 ; v2@11049.39,8400.61 ccw(c11023.79,8426.21) 11060,8426.21 ccw(c11096.21,8426.21) v2@11070.61,8400.61 ; 11136,9324.47 11125.47,9324.47 11100,9299 ; v1(11871,9370) 11871,9316 11800,9245 11468.94,9245 11389.47,9324.47 11100,9324.47 ; 11053.53,9324.47 11100,9324.47 ; 11053.53,9324.47 11074.53,9324.47 11100,9299 ; 11100,9299 11100,9324.47
3.3V_2401: C68.1 C69.1 R46.1 U3.15 U3.16 U4.4 | length 985.9
  Top Layer w20: U4.4@11630,7880 11630,7783 11643,7770 C68.1@11680,7770 R46.1@11680,7680 11680,7635 ; U3.15@11677,7497 11680,7500 11680,7635 ; 11680,7582 11680,7597 11698,7615 ; 11680,7615 11698,7615 ; C69.1@11870,7680 11870,7635 11850,7615 11698,7615 ; 11680,7635 11680,7633 11698,7615
  Bottom Layer w20: U3.16@11663.19,7410.81 ccw(c11629.86,7444.14) 11677,7444.14 ccw(c11724.14,7444.14) U3.16@11690.81,7410.81 ; U3.15@11663.19,7483.19 cw(c11629.86,7449.86) 11677,7449.86 cw(c11724.14,7449.86) U3.15@11690.81,7483.19 ; U3.16@11677,7397 U3.15@11677,7497
+3.3V: C4.1 C5.1 C8.2 C36.2 C37.2 C38.2 C39.2 C41.2 DS2.1 DS3.1 P10.52 P10.148 R9.2 R9.4 R9.6 R9.8 R10.2 R10.4 R10.6 R10.8 R11.2 R11.4 R11.6 R11.8 R12.2 R12.4 R27.2 R28.2 R35.1 R36.1 R40.2 R43.2 R44.2 R88.2 U5.8 U6.16 U17.16 | length 10282
  Top Layer w10: v1(10772,7443.87) 10773,7443.87 10857.09,7527.95 U6.16@10920,7527.95
  Top Layer w15: R40.2@11190,7590 11190,7515 11207.64,7497.36 11235,7497.36 ; 11209,7539 11209,7523.36 11235,7497.36 ; U17.16@11300,7497.36 11258,7497.36 ; 11351.64,7497.36 11258,7497.36 ; 11235,7497.36 11258,7497.36
  Top Layer w20: v1@8306.39,6718.87 DS2.1@8306.39,6771.39 ; P10.52@8322,7252 8322,7457 8440,7575 8750,7575 8805,7520 U5.8@8880,7520 9065,7520 9070,7525 ; v1@8586.39,6718.47 DS3.1@8586.39,6771.39 ; v1(8870,6720) C36.2@8870,6790 ; v1(9030,6718.47) 9030,6780 R44.2@9030,6870 ; R9.8@10198,6821.19 10217,6821.19 ; C38.2@10214,6718.47 10214,6818.19 10217,6821.19 ; R9.6@10233,6821.19 R9.4@10265,6821.19 ; R9.2@10300,6821.19 10217,6821.19 ; R11.2@10487.01,7410 10487.01,7445 10487.01,7477 R11.8@10487.01,7502 ; v1(10488,7349) 10488,7399.8 R11.2@10488.2,7400 ; R11.8@10488.2,7502 10488.2,7685.2 10523,7720 10548,7720 R36.1@10600,7720 R35.1@10690,7720 10936,7720 ; R10.8@10893,6828.19 R10.6@10928,6828.19 R10.4@10960,6828.19 R10.2@10995,6828.19 C39.2@10995,6718.47 ; C37.2@10965,7660 v1(10965,7742) 10943,7720 10936,7720 ; 10965,7699 10944,7720 10936,7720 ; 10965,7720 10936,7720 ; C39.2@10990,6715 C39.2@11000,6705 ; R40.2@11190,7590 C41.2@11190,7670 v1(11190,7742) ; R12.4@11501,7108 R12.2@11501,7132
  Top Layer w40: v2(8115,6820) 8115,7125 8242,7252 P10.52@8322,7252 ; C8.2@9070,7565 9070,7525 9070,7480 R28.2@9160,7480 ; v2(10134,6718.47) C38.2@10214,6718.47 ; C39.2@10992,6718 11058.53,6718 v2(11059,6718.47) ; C5.1@11414,7460 11458.3,7460 11516,7402.3 11516,7150 11552,7150 ; 11516,7208 11516,7186 11552,7150 ; C4.1@11745,7150 11552,7150 ; C4.1@11750,7165 11750,7035 11855,6930 ; 11819.5,6965.5 11821,6964 11889,6964 ; 11886.5,6898.5 11889,6901 11889,6964 ; v2(11901.53,6718.47) 11901.53,6883.47 11855,6930 ; R88.2@12020,7020 11945,7020 11889,6964 ; 11855,6930 11889,6964
  Bottom Layer w20: v1(10488,7349) 10582.87,7443.87 v1(10772,7443.87) ; v1(10965,7742) v1(11190,7742)
  Bottom Layer w40: v2(8115,6820) 8216.53,6718.47 v2(11901.53,6718.47)
  other v1: 8306,6718.47 8586,6718.47
+5V: C1.1 C6.1 C15.2 C19.2 C20.2 C21.2 C22.2 C23.2 C26.2 C27.2 C28.2 C33.2 C43.2 C45.2 C46.2 C50.2 C56.1 C67.1 F1.2 LS1.1 P1.4 P2.4 P3.4 P4.4 P12.5 P12.6 P14.1 R1.2 R18.2 R18.4 R26.2 R26.4 R26.6 R26.8 R34.1 R34.3 R34.5 R34.7 R39.2 R39.4 R39.6 R39.8 R50.3 R50.5 R50.7 R112.2 R125.2 R167.2 R168.2 R183.2 U1.1 U1.2 U2.14 U4.1 U4.2 U9.14 U10.14 U11.14 U16.14 U21.14 U106.8 | length 30647.9
  Top Layer w20: P1.4@7547.8,9541.06 7607.94,9541.06 7619,9530 7619,9507 7629,9497 C20.2@7692,9497 v2@7770,9497 ; P4.4@7550,7164.36 7490.64,7164.36 7460,7195 7460,7325 7562,7427 C23.2@7620,7427 7620,7472 7702,7554 7702,7567 7702,8996 7765,9059 ; 7770,9120 7765,9115 7765,9059 ; 7798,9092 7765,9059 ; P12.6@7847,9092 7827,9092 7794,9059 7765,9059 ; v1(8291.81,9110.19) R26.2@8291.81,9302 ; R18.4@8454.8,7865 8455,7865.2 8455,7950 8472,7967 v2(8507,7967) ; U10.14@8890,8376.77 8986.77,8376.77 8995,8385 C27.2@8995,8435 ; v2(8895,8960) 8895,9005 8910,9020 C33.2@8950,9020 U21.14@8950,8902.36 ; v2(10065,10785) 10065,10710 C19.2@10070,10705 10180,10705 10220,10665 LS1.1@10220,10515 ; U11.14@10150,8082 10207,8082 10220,8095 v2(10220,8189) ; v2@10422,8245 v2(10414,8253) ; R50.7@10569.01,8210 R50.3@10569.01,8277 10438,8277 v2(10414,8253) ; R39.8@11029.81,9085 v1(11029.81,9258) ; C67.1@11480,7690 C56.1@11480,7770 U4.1@11480,7880 ; U4.1@11480,7898.06 U4.1@11480,7880 ; U4.1@11480,7911 11470,7921 11459,7921 ; 11480,7939 11462,7921 11459,7921 ; U4.2@11530,7880 11530,7965 11515,7980 11490,7980 11480,7970 U4.1@11480,7880 ; U16.14@11780,8782.95 v1(11780,8815) C26.2@11780,8870 ; U9.14@11790,8366.77 C50.2@11866.77,8366.77 ; C50.2@11884,8365 11885,8366 v1(11940,8366) ; U2.14@11910,9877.95 C28.2@12014,9877.95 ; v1(11912,8781) R34.5@11912,8861 ; R34.5@11912.01,8860 R34.1@11912.01,8924.01 ; v2(11939,10785) 11939,10611 11970,10580 R168.2@12030,10580 ; R167.2@12543.64,10426.36 12594.14,10476.86 ; 12599.37,10525.63 12594.14,10520.39 12594.14,10476.86 ; 12621.14,10503.86 12594.14,10476.86 ; 12647,10478 12645.86,10476.86 12594.14,10476.86 ; C21.2@12660,10280 12720,10280 12756,10316 ; P3.4@12726.57,7300 P3.4@12730,7303.43 12620,7303.43 12590,7333.43 12590,7730 12695,7835 12780,7835 12860,7915 v2(12860,8350) ; P2.4@12730,10024.21 12949,10024.21 ; P3.4@12751.64,7300 P3.4@12752,7299.64 ; 12759.65,10365.35 12756,10361.7 12756,10316 ; 12776.57,10348.43 12776.57,10336.57 12756,10316 ; 12804.5,10320.5 12800,10316 12756,10316 ; 12980,9976 12980,9993.21 12949,10024.21 ; 12980,10024 12979.79,10024.21 12949,10024.21 ; 12980,10062 12980,10055.21 12949,10024.21 ; v2(10414,8253) 10414,7841 10449,7806 10770,7806 10885,7921 11459,7921 ; 11459,7921 11480,7900 U4.1@11480,7880
  Top Layer w30: R125.2@9668,8045 C43.2@9768,8045 9768,8106 9872,8210 ; v2(9764,8892) 9764,8784 9764,8531 9883,8412 9883,8260 ; 9883,8326 9883,8299 9922,8260 ; 9953,8260 9922,8260 ; v2@10208,8190 C15.2@10150,8190 10150,8240 10130,8260 9883,8260 ; 9872,8210 9883,8221 9883,8260 ; 9872,8210 9922,8260
  Top Layer w40: C27.2@8990,8450 v2(9080,8450) ; v2(9891,8892) C46.2@9959,8892 ; v2@9905,9188 C1.1@10055,9188 ; C6.1@10060,9095 10060,9135 C1.1@10060,9185 10060,9284 ; 10060,9322 10060,9284 ; 10096,9320 10060,9284 ; C28.2@12014,9876 12079,9876 v2(12082,9879) ; v2(12860,8350) 12860,8420 ; 12860,8430 12860,8420 ; 12988,10239.65 12988,9401 12923,9336 12788,9336 12712,9260 12712,9068 12860,8920 12860,8420
  Top Layer w50: v2(7770,9520) 7770,9497 7770,9120 7798,9092 P12.6@7847,9092 P12.5@7947,9092 ; R1.2@8467,10572 C45.2@8467,10672 ; C45.2@8467,10660 C45.2@8467,10672 ; F1.2@8942,10792 8792,10792 v2(8785,10785) 8517,10785 8467,10735 C45.2@8467,10672 ; v2(12505,10620) 12819.82,10305.18 12922.47,10305.18 12988,10239.65
  Bottom Layer w20: 8262,8986 8262,8996 8292,9026 ; 8290.95,8986 8292,8987.05 8292,9026 ; v1(8291.81,9110.19) 8292,9110 8292,9026 ; 8335,8986 8332,8986 8292,9026 ; v2(8507,7967) 8990,8450 v2(9080,8450) ; v2@8507,7982 ccw(c8507,8018.21) 8532.61,7992.61 ccw(c8558.21,7967) v2@8522,7967 ; v2(8785,10785) 8786,10786 8829,10786 8830,10785 ; v2@8795.61,10774.39 cw(c8823.63,10746.37) 8823.63,10786 ; v2@8795.61,10795.61 ccw(c8818.8,10818.8) 8818.8,10786 ; 8915,10785 8920,10780 ; v2@9069.39,8439.39 ccw(c9043.79,8413.79) 9043.79,8450 ccw(c9043.79,8486.21) v2@9069.39,8460.61 ; v1(10060,9258) v1(11029.81,9258) ; v2@10060,10785 v2(10065,10785) ; v1(11780,8815) 11878,8815 11948,8745 v2@12860,8745 ; v1(11940,8366) 11989,8366 12010,8345 12855,8345 v2(12860,8350) ; 12811.72,8345 ccw(c12811.72,8398.28) v2@12849.39,8360.61 ; 12821.37,8745 ccw(c12821.37,8784.63) v2@12849.39,8756.61 ; 12826.2,8745 cw(c12826.2,8712.2) v2@12849.39,8735.39
  Bottom Layer w30: v2(10220,8189) 10284,8253 v2(10414,8253)
  Bottom Layer w40: 8835,8610 8845,8600 8887,8600 ; 8835,8668.6 8835,8652 8887,8600 ; 9032,8600 9036,8600 9080,8556 ; v2(9080,8450) 9080,8556 ; 9146,8600 9124,8600 9080,8556 ; 9891,8961 9891,8937 9846,8892 ; v2(9891,9188) v2(9891,8892) 9846,8892 ; 8887,8600 9070,8600 ; 9070,8600 9080,8590 9080,8556 ; 9070,8600 9405,8600 9697,8892 9846,8892
  Bottom Layer w50: v2(7770,9520) 7770,10618 7937,10785 v2(8785,10785) 8830,10785 8915,10785 10060,10785 11935,10785 12092,10628 12092,10620 ; P12.5@7947,9092 8093,9092 8199,8986 8835,8986 ; 8835,8610 8835,8986 ; v2(12082,9879) 12210,10007 12210,10230 12165,10275 ; P14.1@12090,10275 P14.1@12092,10275 ; P14.1@12092,10272 P14.1@12092,10275 ; 12092,10359 12092,10348 12165,10275 ; 12092,10540 12092,10556 12156,10620 ; v2(12505,10620) 12156,10620 ; 8835,8986 cw(c8835,8903.78) v2(8895,8960) 8869,8986 8835,8986 ; P14.1@12092,10275 12092,10620 ; P14.1@12092,10275 12165,10275 ; 12092,10620 12156,10620
  other v2: 12860,8746
+5V1: C2.1 C3.2 C10.2 C11.1 C51.1 F1.1 L1.2 MAX1.16 P10.1 P10.149 U18.4 | length 6083.5
  Top Layer w20: C10.2@11274,10738 11340,10738 ; v1(11340,10675) 11340,10738 ; MAX1.16@11418.72,10628 11418.72,10661.28 11384,10696 C11.1@11384,10738 11340,10738
  Top Layer w50: U18.4@8228.93,10055.66 v2(8228.93,10137) ; L1.2@8632,10388 8913,10388 9077,10552 9156,10552 9175.5,10571.5 ; 9203,10638 9210,10645 9263,10645 ; 9203,10701.3 9259.3,10645 9263,10645 ; F1.1@9203,10768 9203,10599 9175.5,10571.5 ; v2(9535.39,10235.39) 9405.39,10235.39 C2.1@9405,10235 C51.1@9405,10645 9263,10645 ; 9175.5,10571.5 9249,10645 9263,10645
  Bottom Layer w20: 10685,10315 10688,10315 10730,10357 ; 10730,10315 10730,10357 ; 10772,10315 10730,10357 ; v1(11340,10675) 10895,10675 10730,10510 10730,10357
  Bottom Layer w50: v2(8228.93,10137) 8437,10137 ; v2(9535.39,10235.39) 9615,10315 10730,10315 10767,10278 10767,10256 ; 10730,10336 10767,10299 P10.1@10767,9857 10817,9857 ; 10767,9950 10767,9907 10817,9857 ; P10.149@11354,9571 11354,9624 11325,9653 10908.75,9653 10873,9688.75 10873,9827 10843,9857 10817,9857
  other v1: 8478,10135 8528,10135 8583,10135 8628,10135 8453,10180 8453,10225 8453,10275 8453,10320 8455,10362 8455,10407
+16V1: C47.1 D1.1 P12.1 P12.2 P12.3 P12.4 R15.2 U20.6 | length 8203.6
  Top Layer w10: R15.2@9490,7610 9425,7610 9411.57,7623.43 9411.57,7978.57 9663,8230 9663,9596 v2(9745,9678)
  Top Layer w20: D1.1@7832,9632 7832,9724 7855,9747 8215,9747 v2(8284,9678) ; 7847,9517 7861,9517 ; v2(9745,9678) 10843,9678 10931,9766 v2(11421,9766) ; v2(12260,9765) C47.1@12340,9765 12462,9765 12475,9752 U20.6@12475,9682.64
  Top Layer w50: 7847,9369 7847,9337 7892,9292 ; D1.1@7847,9597 7847,9517 P12.2@7847,9292 ; P12.2@7847,9292 7892,9292 ; P12.2@7847,9292 P12.4@7847,9192 P12.3@7947,9192 P12.1@7947,9292 7892,9292
  Bottom Layer w20: v2(8284,9678) v2(9745,9678) ; v2@8294.61,9667.39 cw(c8320.21,9641.79) 8320.21,9678 cw(c8320.21,9714.21) v2@8294.61,9688.61 ; v2@9734.39,9667.39 ccw(c9708.79,9641.79) 9708.79,9678 ccw(c9708.79,9714.21) v2@9734.39,9688.61 ; v2(11421,9766) 12259,9766 v2(12260,9765) ; v2@11431.61,9755.39 cw(c11457.21,9729.79) 11457.21,9766 cw(c11457.21,9802.21) v2@11431.61,9776.61 ; 12221.37,9766 cw(c12221.37,9726.37) v2@12249.39,9754.39 ; 12226.2,9766 ccw(c12226.2,9798.8) v2@12249.39,9775.61
AB_1: P12.11 R32.5 | length 387.6
  Top Layer w10: P12.11@7947,8792 8018,8792 8096,8870 8096,9032 8104,9040 R32.5@8137.01,9040
AB_1_F: P10.42 U21.1 | length 949.5
  Top Layer w10: U21.1@8731.5,8902.36 8779.17,8902.36 8790,8913.19 8790,9325 8830,9365 8830,9647 8767,9710 P10.42@8767,9757
AB_2: P13.12 R19.4 | length 174.5
  Top Layer w10: R19.4@12160,9010 12309,9010 P13.12@12327,8992
AB_2_F: P10.147 U2.5 | length 551.5
  Top Layer w10: P10.147@11354,9471 11457,9574 11457,9724 11508.59,9775.59 U2.5@11691.5,9775.59
AB_3: P13.25 R23.8 | length 329.5
  Top Layer w10: R23.8@12162.99,8450 12200,8450 12310,8340 12379,8340 P13.25@12427,8292
AB_3_F: P10.138 U16.1 | length 574
  Top Layer w10: P10.138@11254,8971 11300,8925 11565,8925 11635,8855 11635,8790 11622.95,8777.95 U16.1@11560,8777.95
AB_4: P12.27 R29.7 | length 376.2
  Top Layer w10: P12.27@7947,7992 7961,7992 8174,8205 R29.7@8235,8205
AB_4_F: P10.32 U10.13 | length 1706.3
  Top Layer w10: U10.13@8890,8351.18 9121.18,8351.18 9215,8445 ; 9208.68,8438.68 9215,8445 ; P10.32@9267,9757 9267,8497 9215,8445
AB_DB: P13.22 R23.4 | length 174.4
  Top Layer w10: R23.4@12162.99,8517 12302,8517 P13.22@12327,8492
AB_DB_F: P10.140 U16.11 | length 762.6
  Top Layer w10: P10.140@11254,9071 11300,9025 11545,9025 11700,8870 11700,8725 11723.82,8701.18 U16.11@11778.5,8701.18
AD_/CS: P10.85 U11.2 | length 1058.2
  Top Layer w10: U11.2@9895,8032 U11.2@9930,8032 10016,8032 10028,8020 10028,7575 10070,7533 10070,7255 ; P10.85@10022,7152 10070,7200 10070,7255 ; 10070,7270 10070,7255
AD_CLK: P10.89 U11.12 | length 945.9
  Top Layer w10: U11.12@10150,7982 10095,7982 10085,7972 10085,7623 10172,7536 10172,7202 P10.89@10222,7152
AD_DI: P10.88 U11.13 | length 891.5
  Top Layer w10: P10.88@10122,7252 10122,7536 10058,7600 10058,8020 10070,8032 U11.13@10150,8032
AD_DO: U8.5 U11.10 | length 1208.1
  Top Layer w10: U11.10@10150,7882 10225,7882 10299,7956 10299,8349 10668.23,8718.23 U8.5@10781.5,8718.23
AD_DO_F: P10.90 U8.6 | length 1729.7
  Top Layer w10: P10.90@10222,7252 10334,7364 10334,8343 10683.64,8692.64 U8.6@10781.5,8692.64
AD_SARS: U8.3 U11.11 | length 1232
  Top Layer w10: U11.11@10150,7932 10215,7932 10271,7988 10271,8340 10271,8363 10371,8463 10371,8521 10389.5,8539.5 10619.41,8769.41 U8.3@10781.5,8769.41
AD_SARS_F: P10.92 U8.4 | length 1821.6
  Top Layer w10: P10.92@10322,7252 10322,7312 10363,7353 10363,8328 v1(10408,8373) ; v1(10408,8512) 10638.82,8742.82 U8.4@10781.5,8743.82
  Bottom Layer w10: v1@10402.7,8378.3 ccw(c10389.89,8391.11) 10408,8391.11 ccw(c10426.11,8391.11) v1@10413.3,8378.3 ; v1@10402.7,8506.7 cw(c10389.89,8493.89) 10408,8493.89 cw(c10426.11,8493.89) v1@10413.3,8506.7 ; v1(10408,8373) v1(10408,8512)
AT_1: P12.13 R32.7 | length 391.7
  Top Layer w10: P12.13@7947,8692 8137.01,8882.01 R32.7@8137.01,9005
AT_1_F: P10.40 U21.3 | length 997.3
  Top Layer w10: U21.3@8731.5,8851.18 8793.18,8851.18 8812,8870 8812,9307 8865,9360 P10.40@8865,9757
AT_2: P13.11 R19.2 | length 289
  Top Layer w10: R19.2@12160,9045 12374,9045 P13.11@12427,8992
AT_2_F: P10.2 U2.3 | length 1001.7
  Top Layer w10: P10.2@10767,9757 10844,9757 10913.77,9826.77 11691.5,9826.77 11643.23,9826.77
AT_3: P13.27 R24.4 | length 301.3
  Top Layer w10: R24.4@12162.99,8282 12258,8282 12295,8245 12374,8245 P13.27@12427,8192
AT_3_F: P10.136 U16.5 | length 457.2
  Top Layer w10: P10.136@11254,8871 11300,8825 11465,8825 11475,8815 11475,8695 11494.41,8675.59 U16.5@11560,8675.59
AT_4: P12.29 R21.3 | length 257.8
  Top Layer w10: P12.29@7947,7892 7992,7892 8035,7935 R21.3@8187.01,7935
AT_4_F: P10.30 U10.9 | length 1826.9
  Top Layer w10: U10.9@8890,8248.82 9096.82,8248.82 9367,8519 P10.30@9367,9757
AT_DB: P13.20 R23.2 | length 180.6
  Top Layer w10: R23.2@12162.99,8552 12287,8552 P13.20@12327,8592
AT_DB_F: P10.139 U16.13 | length 630.9
  Top Layer w10: P10.139@11354,9071 11539,9071 11720,8890 11720,8763 11730.64,8752.36 U16.13@11778.5,8752.36
BB_1: P12.15 R33.1 | length 331.4
  Top Layer w10: P12.15@7947,8592 8047,8492 R33.1@8237.01,8492
BB_1_F: P10.37 U21.5 | length 1200.5
  Top Layer w10: U21.5@8731.5,8800 8810,8800 8833,8823 8833,9290 8915,9372 8915,9805 P10.37@8967,9857
BB_2: P13.10 R20.8 | length 578.7
  Top Layer w10: R20.8@12160,9567 12160,9200 12268,9092 P13.10@12327,9092
BB_2_F: P10.4 U2.1 | length 1074.6
  Top Layer w10: P10.4@10667,9757 10715,9805 10831,9805 10903.95,9877.95 U2.1@11691.5,9877.95
BB_3: P13.29 R24.8 | length 315
  Top Layer w10: R24.8@12162.99,8215 12225,8215 12300,8140 12379,8140 P13.29@12427,8092
BB_3_F: P10.129 U9.11 | length 590.5
  Top Layer w10: P10.129@11354,8571 11401,8571 11506.58,8465.42 11609.58,8465.42 11710,8365 11710,8300 11720,8290 U9.11@11790,8290
BB_4: P12.30 R21.1 | length 370.2
  Top Layer w10: P12.30@7847,7892 7852,7892 7905,7945 7980,7945 8000,7965 R21.1@8187.01,7965
BB_4_F: P10.29 U10.11 | length 1882.9
  Top Layer w10: U10.11@8890,8300 9109,8300 9320,8511 9320,9810 P10.29@9367,9857
BB_DB: P13.26 R24.2 | length 174.4
  Top Layer w10: R24.2@12162.99,8317 12302,8317 P13.26@12327,8292
BB_DB_F: P10.135 U16.3 | length 330.2
  Top Layer w10: P10.135@11354,8871 11479,8871 11500,8850 11500,8740 11513.23,8726.77 U16.3@11560,8726.77
BT_1: P12.17 R33.3 | length 304.5
  Top Layer w10: P12.17@7947,8492 7982,8457 R33.3@8237.01,8457
BT_1_F: P10.38 U21.13 | length 1002.2
  Top Layer w10: U21.13@8950,8876.77 8888.23,8876.77 8855,8910 8855,9269 8967,9381 P10.38@8967,9757
BT_2: P13.9 R20.6 | length 697.9
  Top Layer w10: R20.6@12160,9602 12198,9602 12215,9585 12215,9210 12280,9145 12374,9145 P13.9@12427,9092